# Altium PCB PCB1 2 layers.PcbDoc
Units mm, origin at the board's own origin, x right, y up, seen from the top; angles counter-clockwise.
Board outline 88 x 76.5 mm, 2 copper layers (Top Layer, Bottom Layer), stack 0.211 mm thick; 44 components, 65 nets, 251 pads, 118 vias.
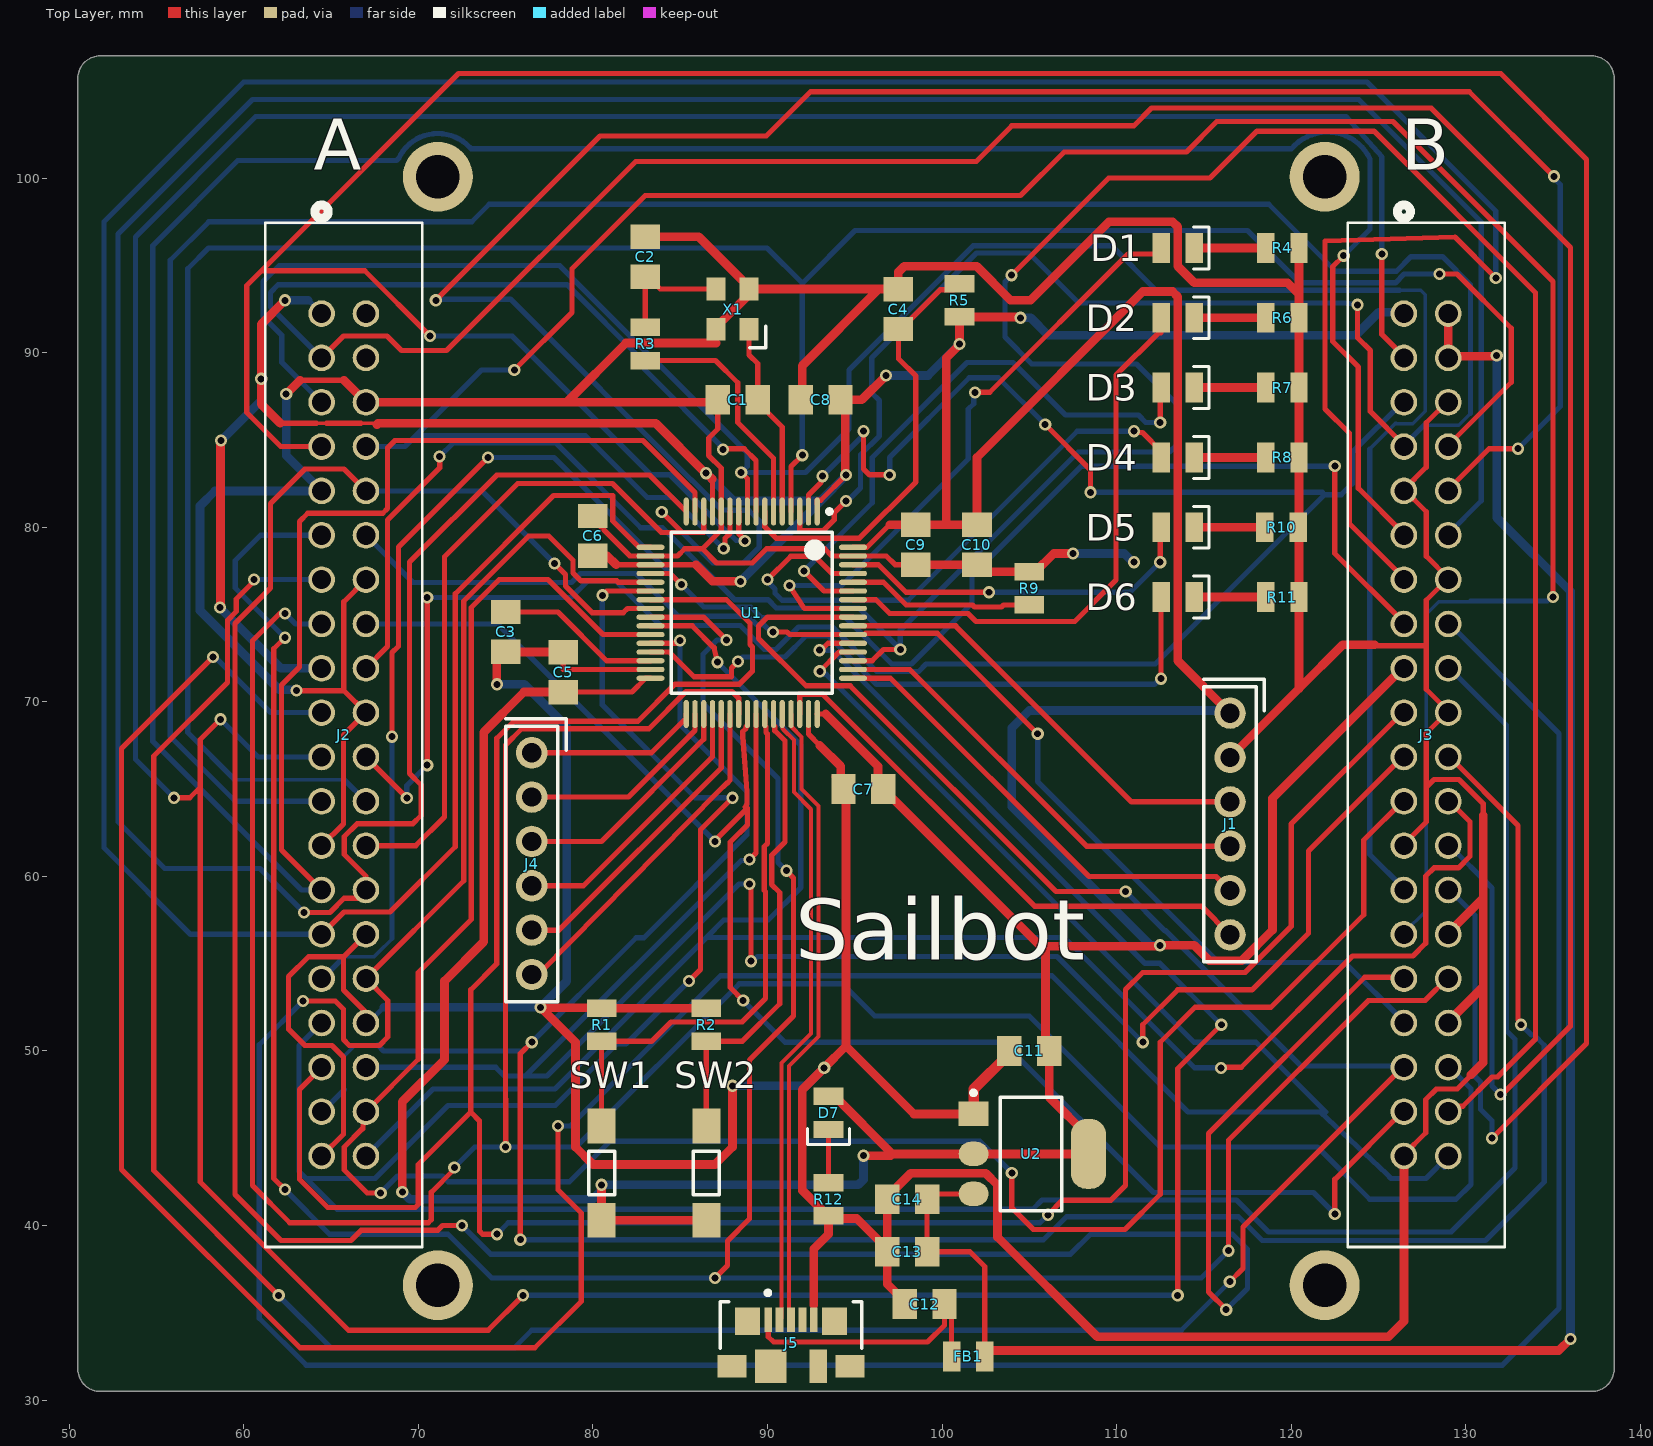
[diagram p0: Top Layer view]
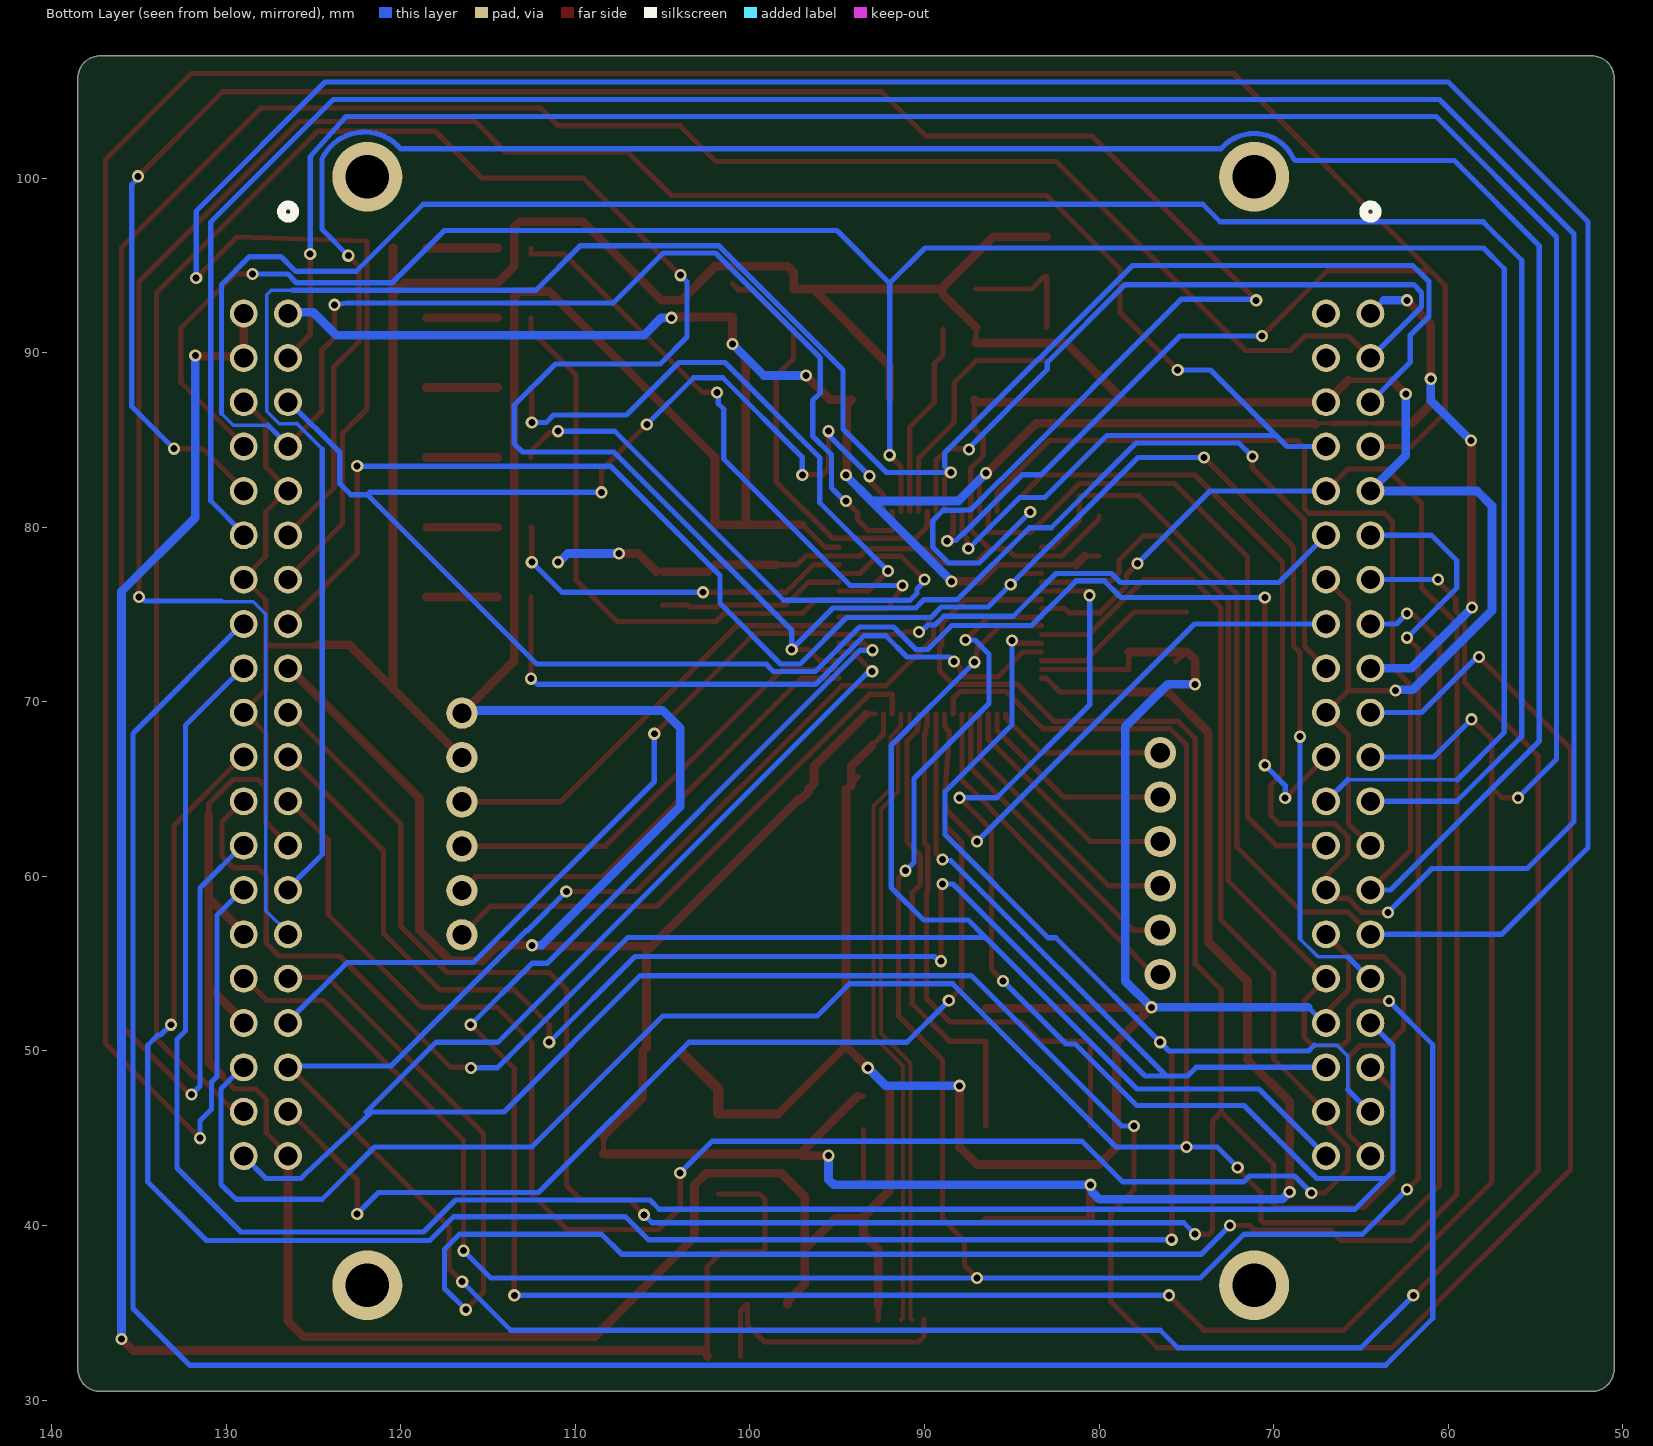
[diagram p1: Bottom Layer view, seen from below]
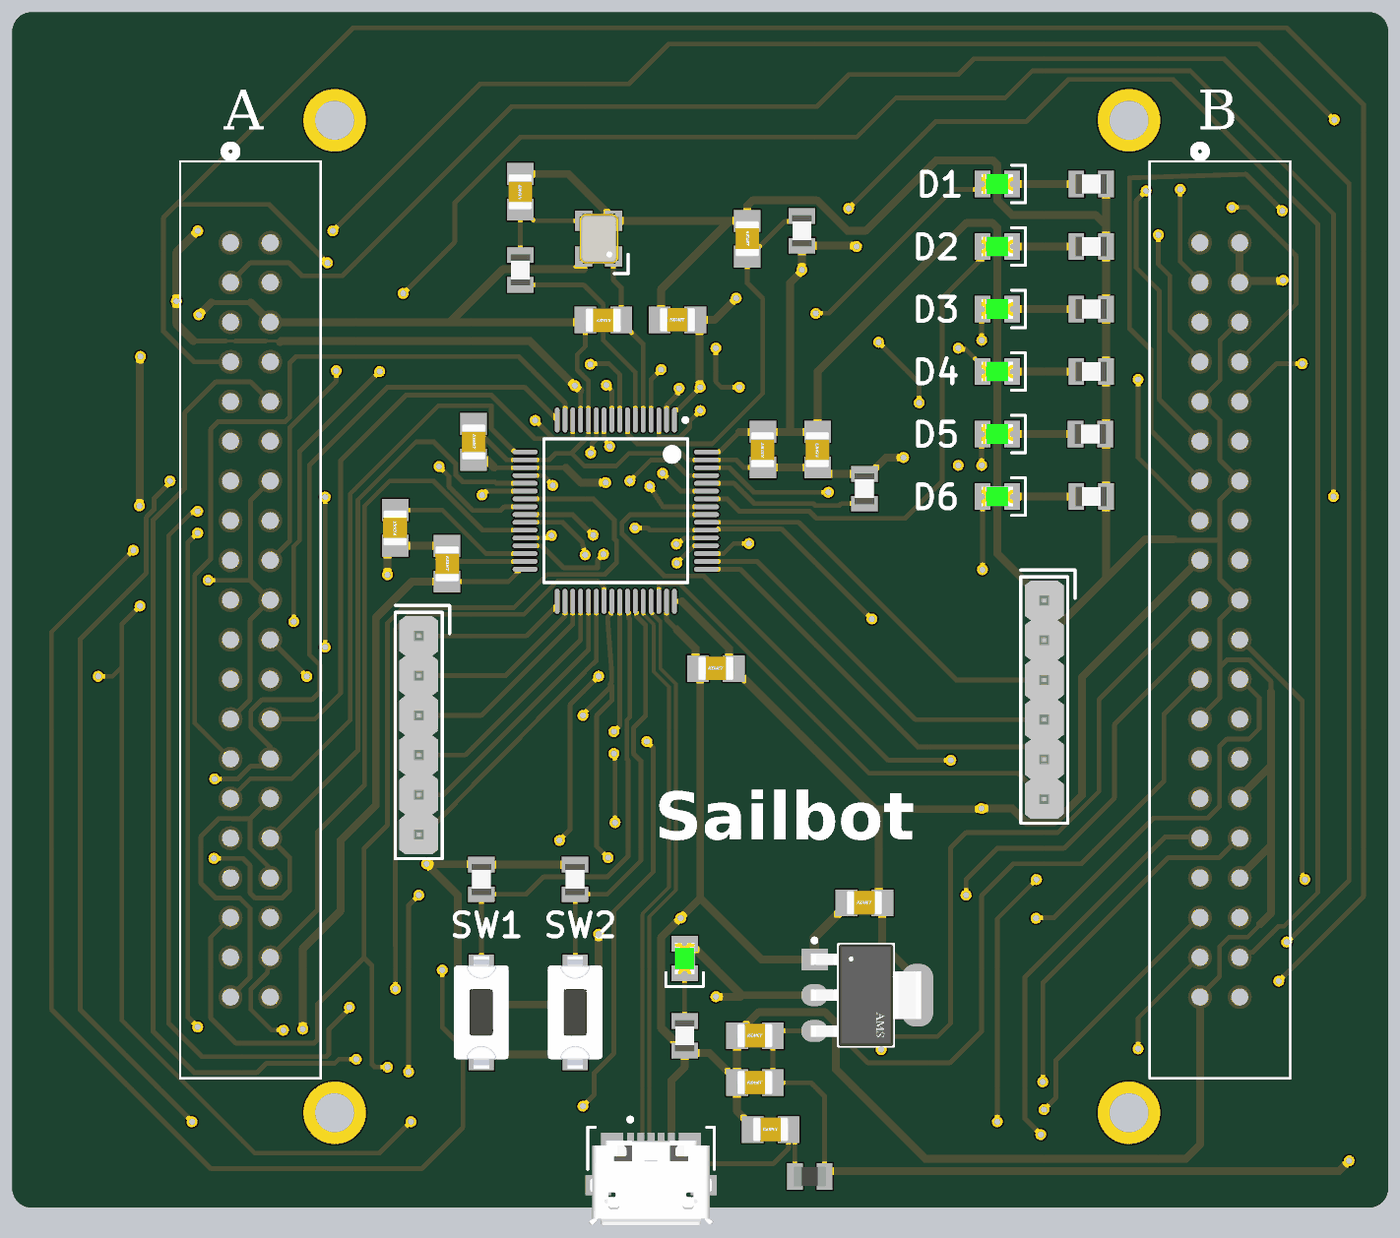
[diagram p2: 3D render of the assembled board from above, using the file's embedded part models]

## Layer stack, top to bottom
Top Solder: solder mask 0.0102, Solder Resist, Dk 3.5
Top Layer: signal copper 0.0356
Dielectric 1: core 0.1397, Core-017, Dk 4.1
Bottom Layer: signal copper 0.0356
Bottom Solder: solder mask 0.0102, Solder Resist, Dk 3.5

## Board outline
50.5,31.77 ccw(c51.77,31.77) 51.77,30.5 137.23,30.5 ccw(c137.23,31.77) 138.5,31.77 138.5,105.73 ccw(c137.23,105.73) 137.23,107 51.77,107 ccw(c51.77,105.73) 50.5,105.73

## Design rules (kind name [scope] priority, off if disabled: settings)
Clearance [All] p1: gap=0.254 ignorepadtopadclearanceinfootprint=FALSE except(0: Arc-Hole Track-Hole SMDPad-Hole THPad-Hole Via-Hole Fill-Hole Poly-Hole Region-Hole Text-Hole; 0.127: Arc-Arc Arc-Track Arc-SMDPad Track-Track Track-SMDPad SMDPad-SMDPad; 0.33: Arc-THPad Arc-Via Track-THPad Track-Via SMDPad-THPad SMDPad-Via THPad-Via Via-Via; 0.5: THPad-THPad)
DiffPairsRouting [All] p1: maxlimit=0.2 minlimit=0.2 mostfreqgap=0.2 toplayer_minwidth=0.235 toplayer_maxwidth=0.235 toplayer_prefwidth=0.235 bottomlayer_minwidth=0.235 bottomlayer_maxwidth=0.235 bottomlayer_prefwidth=0.235 impedanceprofiledriven=TRUE impedanceprofileid={3DAFF3E0-E45B-4C19-A753-60FD53768F31} impedanceprofilevalue=90.000000 maxuncoupledlength=12.7
HoleSize [IsVia] p1: absolutevalues=TRUE maxlimit=2.54 minlimit=0 maxpercent=80.000 minpercent=20.000
PolygonConnect [All] p1: connectstyle=Direct reliefconductorwidth=0.254 reliefentries=4 polygonreliefangle="90 Angle" airgapwidth=0.254
RoutingVias [All] p1: holewidth=0.4 width=0.7 viastyle="Through Hole" minholewidth=0.3 minwidth=0.55 maxholewidth=0.4 maxwidth=0.9
SolderMaskExpansion [All] p1: expansion=0.102 istentingtop=FALSE
UnRoutedNet [All] p1: checkbadconnections=TRUE
Width [All] p1: maxlimit=1 minlimit=0.13 preferedwidth=0.3 minimp=50.000000 maximp=50.000000 favimp=50.000000
27 further rules are at their usual default settings.

## Classes and differential pairs
differential pair USB_D: +USB_D_P -USB_D_N

## Components (designator, comment, footprint, x,y, rotation, side; value= is the part's Value field where it differs from the comment)
C1 "28pF" CAP_0805 88.3,87.3 r180 top
C2 "28pF" CAP_0805 83,95.5 r90 top
C3 "2.2uF" CAP_0805 75,74 r90 top
C4 "100nF" CAP_0805 97.5,92.5 r270 top
C5 "100nF" CAP_0805 78.3,71.7 r270 top
C6 "100nF" CAP_0805 80,79.5 r270 top
C7 "100nF" CAP_0805 95.5,65 r0 top
C8 "100nF" CAP_0805 93.043,87.3 r0 top
C9 "100nF" CAP_0805 98.5,79 r90 top
C10 "2.2uF" CAP_0805 102,79 r90 top
C11 "22uF" CAP_0805 105,50 r0 top
C12 "2.2uF" CAP_0805 99,35.5 r0 top
C13 "2.2uF" CAP_0805 98,38.5 r0 top
C14 "22uF" CAP_0805 98,41.5 r0 top
D1 "GREEN" LED_0805_GREEN 113.5,96 r180 top
D2 "GREEN" LED_0805_GREEN 113.5,92 r180 top
D3 "GREEN" LED_0805_GREEN 113.5,88 r180 top
D4 "GREEN" LED_0805_GREEN 113.5,84 r180 top
D5 "GREEN" LED_0805_GREEN 113.5,80 r180 top
D6 "GREEN" LED_0805_GREEN 113.5,76 r180 top
D7 "GREEN" LED_0805_GREEN 93.5,46.45 r90 top
FB1 "120R" FB_0805 101.5,32.5 r0 top
J1 "G800W302018EU" G800W302018EU 116.5,63 r0 top
J2 "BUFFER_LOW" CONN_3020-40-0100-00_CNC 64.46,92.24 r270 top
J3 "BUFFER_HIGH" CONN_3020-40-0100-00_CNC 126.46,92.24 r270 top
J4 "G800W302018EU" G800W302018EU 76.5,60.73 r0 top
J5 "473460001" FP-473460001-MFG 91.35,32.29 r0 top
R1 "10k" RES_0805 80.5,51.5 r270 top
R2 "10k" RES_0805 86.5,51.5 r270 top
R3 "0R" RES_0805 83,90.5 r90 top
R4 "1k" RES_0805 119.5,96 r180 top
R5 "10k" RES_0805 101,93 r270 top
R6 "1k" RES_0805 119.5,92 r180 top
R7 "1k" RES_0805 119.5,88 r180 top
R8 "1k" RES_0805 119.5,84 r180 top
R9 "10k" RES_0805 105,76.5 r270 top
R10 "1k" RES_0805 119.45,80 r180 top
R11 "1k" RES_0805 119.5,76 r180 top
R12 "1k" RES_0805 93.5,41.5 r90 top
SW1 "DTSM-3" DTSM-3 80.5,43 r270 top
SW2 "DTSM-3" DTSM-3 86.5,43 r270 top
U1 "STM32F401RBT6TR" STM-LQFP64_L 89.1,75.1 r270 top
U2 "AMS1117-3.3" FP-AMS1117-IPC_C 105.1,44.1 r0 top
X1 "24MHz" XTAL_3225 88,92.5 r90 top

## Footprints (in the part's own frame and the unit in brackets; to place one, negate y for a bottom-side part, rotate by r counter-clockwise, add the part's x,y. Pads: shape width x height; smd on the part's side, far side on the other; paste and mask are expansions set on the pad)
CAP_0805 [mm]
  rect 1.4x1.7 smd: 1(-1.143,0) 2(1.143,0)
  body extent -1.15,-0.76 1.15,0.79, height 1.01
CONN_3020-40-0100-00_CNC [mil]
  round 60 / inner round 60 / far side round 63 hole 43 paste-31.5 mask-31.5: 1(0,0) 2(0,100) 3(100,0) 4(100,100) 5(200,0) 6(200,100) 7(300,0) 8(300,100) 9(400,0) 10(400,100) 11(500,0) 12(500,100) 13(600,0) 14(600,100) 15(700,0) 16(700,100) 17(800,0) 18(800,100) 19(900,0) 20(900,100) 21(1000,0) 22(1000,100) 23(1100,0) 24(1100,100) 25(1200,0) 26(1200,100) 27(1300,0) 28(1300,100) 29(1400,0) 30(1400,100) 31(1500,0) 32(1500,100) 33(1600,0) 34(1600,100) 35(1700,0) 36(1700,100) 37(1800,0) 38(1800,100) 39(1900,0) 40(1900,100)
  silkscreen extent -245,-127 2105,227
DTSM-3 [mm]
  rect 2x1.6 smd: 1(-2.7,0) 2(2.7,0)
  silkscreen extent -1.25,-0.75 1.25,0.75, body extent -3.6,-1.75 3.6,1.75, height 4.96
FB_0805 [mm]
  rect 1x1.7 smd: 1(-0.95,0) 2(0.95,0)
  body extent -1,-0.63 1,0.63, height 0.86
FP-473460001-MFG [mm]
  rect 0.45x1.38 smd paste+0 mask+0: 1(-1.3,2.31) 2(-0.65,2.31) 3(0,2.31) 4(0.65,2.31) 5(1.3,2.31)
  rect 1.425x1.55 smd paste+0 mask+0: 6(-2.487,2.225) 7(2.488,2.225)
  rect 1.65x1.3 smd paste+0 mask+0: 8(-3.375,-0.35) 11(3.375,-0.35)
  rect 1.8x1.9 smd paste+0 mask+0: 9(-1.15,-0.35)
  rect 1x1.9 smd paste+0 mask+0: 10(1.55,-0.35)
  silkscreen extent -4.05,0.67 4.04,3.97, body extent -4.3,-2.48 4.3,3.45, height 0.25
FP-AMS1117-IPC_C [mm]
  rect 1.7x1.4 smd paste+0 mask+0: 1(-3.295,2.29)
  rrect100% 1.7x1.4 smd paste+0 mask+0: 2(-3.295,0) 3(-3.295,-2.29)
  rrect87% 2.004x4 smd paste+0 mask+0: 4(3.295,0)
  silkscreen extent -3.42,-3.25 1.75,3.62, body extent -3.9,-3.35 3.9,3.35, height 0.25
G800W302018EU [mm]
  round 1.8 hole 1.1 mask+0.07: 1(0,6.35) 2(0,3.81) 3(0,1.27) 4(0,-1.27) 5(0,-3.81) 6(0,-6.35)
  silkscreen extent -1.5,-7.9 1.97,8.3, body extent -1.25,-7.62 1.25,7.62, height 8.61
LED_0805_GREEN [mm]
  rect 1x1.7 smd: A(0.95,0) K(-0.95,0)
  silkscreen extent -1.8,-1.2 -0.9,1.2, body extent -1,-0.63 1,0.63, height 1.12
RES_0805 [mm]
  rect 1x1.7 smd: 1(-0.95,0) 2(0.95,0)
  body extent -1,-0.63 1,0.63, height 0.47
STM-LQFP64_L [mm] "QFP, 64-Leads, Body 10x10mm, Pitch 0.5mm, IPC High Density"
  oval 1.6x0.3 smd: 1(-5.8,3.75) 2(-5.8,3.25) 3(-5.8,2.75) 4(-5.8,2.25) 5(-5.8,1.75) 6(-5.8,1.25) 7(-5.8,0.75) 8(-5.8,0.25) 9(-5.8,-0.25) 10(-5.8,-0.75) 11(-5.8,-1.25) 12(-5.8,-1.75) 13(-5.8,-2.25) 14(-5.8,-2.75) 15(-5.8,-3.25) 16(-5.8,-3.75) 33(5.8,-3.75) 34(5.8,-3.25) 35(5.8,-2.75) 36(5.8,-2.25) 37(5.8,-1.75) 38(5.8,-1.25) 39(5.8,-0.75) 40(5.8,-0.25) 41(5.8,0.25) 42(5.8,0.75) 43(5.8,1.25) 44(5.8,1.75) 45(5.8,2.25) 46(5.8,2.75) 47(5.8,3.25) 48(5.8,3.75)
  oval 0.3x1.6 smd: 17(-3.75,-5.8) 18(-3.25,-5.8) 19(-2.75,-5.8) 20(-2.25,-5.8) 21(-1.75,-5.8) 22(-1.25,-5.8) 23(-0.75,-5.8) 24(-0.25,-5.8) 25(0.25,-5.8) 26(0.75,-5.8) 27(1.25,-5.8) 28(1.75,-5.8) 29(2.25,-5.8) 30(2.75,-5.8) 31(3.25,-5.8) 32(3.75,-5.8) 49(3.75,5.8) 50(3.25,5.8) 51(2.75,5.8) 52(2.25,5.8) 53(1.75,5.8) 54(1.25,5.8) 55(0.75,5.8) 56(0.25,5.8) 57(-0.25,5.8) 58(-0.75,5.8) 59(-1.25,5.8) 60(-1.75,5.8) 61(-2.25,5.8) 62(-2.75,5.8) 63(-3.25,5.8) 64(-3.75,5.8)
  silkscreen extent -5.92,-4.6 4.6,4.6, body extent -5,-5 5,5, height 1.6
XTAL_3225 [mm]
  rect 1.3x1.1 smd: 1(-1.15,-0.95) 2(1.15,-0.95) 3(1.15,0.95) 4(-1.15,0.95)
  silkscreen extent -2.23,-1.89 -1,-1, body extent -1.6,-1.28 1.6,1.22, height 0.61

## Part data
C1 C2 C3 C4 C5 C6 C7 C8 C9 C10 C11 C12 C13 C14: library part CAP_0805_16V, "Capacitor SMD 0805 16V"
D1 D2 D3 D4 D5 D6 D7: library part LED_0805_GREEN, "LED 0805 GREEN SMD"
FB1: library part FB_0805, "Ferrite Bead SMD 0805"
J1 J4: "Pin Header 6 Position 2.54mm Pitch", Manufacturer=Amphenol, Manufacturer Part Number=G800W302018EU
J2 J3: library part 3020-40-0100-00, "No Description Available", Mfr_Name="CNC Tech", RefDes=RefDes, Type=Type
J5: library part CMP-2000-05246-2, "CONN RCPT USB2.0 MICRO B SMD R/A", Current Rating=1.8A, Manufacturer=Molex, Package=0, Temperature="-30°C to +85°C", Temperature Range High=+85°C, Temperature Range Low=-30°C, Voltage Rating=30V, Automotive=No, Category=Conn, ComponentLink2Description=Datasheet, ComponentLink2URL=https://www.molex.com/webdocs/datasheets/pdf/en-us/0473460001_IO_CONNECTORS.pdf, Conn Orientation="Right Angle", Contact Material=Gold,Nickel, Device Class L1=Connectors, Device Class L2="USB Connectors", Device Class L3=unset, Digikey Description="CONN RCPT USB2.0 MICRO B SMD R/A", Footprint Url=https://www.molex.com/pdm_docs/sd/473460001_sd.pdf, Height=2.945mm, Is Female=yes, Lead Free=Yes, Manufacturer Part Number=473460001, Number Of Contacts=5, Octopart=https://octopart.com/47346-0001-molex-7164928, Pitch=0.65mm, RoHS=TRUE, Shielding=true, Usb Standard="USB 2.0"
R1 R2 R3 R4 R5 R6 R7 R8 R9 R10 R11 R12: library part RES_0805, "Resistor SMD 0805"
SW1 SW2: "Tactile Switch SMD SPST", Manufacturer=Diptronics, Manufacturer Part Number=DTSM-3
U1: library part CMP-0243-00143-1, "ARM Cortex-M4 32-bit MCU+FPU, 128 KB Flash, 64 KB Internal RAM, 50 I/Os, 64-Pin LQFP, -40 to 85 degC, Tape and Reel", I/Os (High Current)=50, Operating Frequency(F) (Processor speed) (MHz)=84, Package Description=LQFP64, Package Reference="64-Pin Low-profile Quad Flat Package, Body 10 x 10 mm, Pitch 0.5 mm", Supply Voltage(Vcc) min (V)=1.7, ComponentLink1Description="Manufacturer URL", ComponentLink1URL=http://www.st.com/, ComponentLink2Description=Datasheet, ComponentLink2URL=http://www.st.com/st-web-ui/static/active/en/resource/technical/document/datasheet/DM00086815.pdf, Core="ARM Cortex-M4", DatasheetVersion="Rev. 5", FLASH Size (Prog) (kB)=128, Internal RAM Size (kB)=64, Mounting Technology="Surface Mount", Packing="Tape and Reel"
U2: library part CMP-209535-000001-1, "LDO Voltage Regulators 1A, 3.3V", Dropout Voltage=1.1V, Manufacturer="Advanced Monolithic Systems", Max Junction Temp=+125°C, Max Power Dissipation=1.2W, Max Supply Voltage=15V, Nominal Supply Current=5mA, Output Current=1A, Output Voltage=3.3V, Package=AMS1117, Temperature="-40°C to +125°C", Temperature Range Low=-40°C, Automotive=No, Category=IC, ComponentLink2Description=Datasheet, ComponentLink2URL=http://www.advanced-monolithic.com/pdf/ds1117.pdf, Device Class L1="Integrated Circuits (ICs)", Device Class L2="Power Management ICs", Device Class L3="Voltage Regulators - Linear", Height=1.8mm, Ipc Land Pattern Name=SOT229P700X180-4, Lead Free=Yes, Manufacturer Part Number=AMS1117-3.3, Number Of Outputs=1, Octopart=https://octopart.com/ams1117-3.3-advanced+monolithic+systems-25899300, Output Type=Fixed, RoHS=TRUE, Standoff Height=0.64mm, Temperature Range High=+125°C
X1: library part TSX-3225_24.0000MF15X-AC, "Crystal SMD 24MHz 10PPM 7pF 3225", Manufacturer=Epson, Manufacturer Part Number="TSX-3225 24.0000MF15X-AC"

## Free pads (board coordinates)
  round 4 hole 2.5: 1(71.12,36.576) 1(71.12,100.076) 1(121.92,36.576) 1(121.92,100.076)

## Via types
v1: diameter 0.7, hole 0.4, Top Layer to Bottom Layer, 118 vias

## Nets (pads, with @x,y where several pads share a name; then routed paths per layer and width w, separated by ;. In a path a pad name is that pad's centre, name@x,y a point inside that pad or via, vN(x,y) a via of type N, cw(c..) or ccw(c..) an arc to the next point about the centre after c; other vN are vias at no path point)
3V3: C5.2 C6.2 C7.2 C8.2 C9.2 C10.2 C11.2 D7.A J1.1 J2.1 J2.17 J3.1 J3.17 R5.2 SW1.2 SW2.2 U1.1 U1.13 U1.19 U1.32 U1.48 U1.64 U2.2 U2.4 | length 378.1
  Top Layer w0.2: 64.159,85.955 64.761,85.955 ; 66.699,85.955 67.563,85.955 67.628,85.89
  Top Layer w0.3: v1(58.634,75.402) v1@58.667,75.435 ; v1@58.667,84.93 v1(58.699,84.963) ; 62.086,85.955 64.159,85.955 ; 64.761,85.955 66.699,85.955 ; C5.2 82.233,70.557 83.026,71.35 U1.32 ; C6.2 C6.2@80.825,78.357 ; 81.332,77.85 U1.19 85.903,77.85 ; U1.13 86.85,82.741 ; U1.48 93.343,69.3 ; U1.1@92.85,81.35 92.85,81.55 93.05,81.55 v1(94.5,83) ; D7.A D7.A@93.85,47.4 ; U1.64 95.707,78.85 97,80.143 ; v1@104.419,92.05 104.469,92 v1(104.5,92) ; U2.4 U2.4@108.395,45.098
  Top Layer w0.5: v1@58.667,75.435 v1@58.667,84.93 ; 62.086,85.955 61,87.042 v1(61,88.5) 61,91.635 v1(62.365,93) ; 67.628,85.89 67.693,85.955 83.594,85.955 v1@86.451,83.098 ; v1(69.085,41.927) 69.085,47.085 71.5,49.5 71.5,54 73.754,56.254 73.754,68.254 76.057,70.557 C5.2 ; v1(80.5,42.33) SW1.2 SW2.2 ; C6.2@80.825,78.357 81.332,77.85 ; 85.903,77.85 86.854,76.898 v1(88.456,76.898) ; v1@86.512,83.08 86.823,82.769 ; 93.343,69.3 96.338,66.305 96.338,65.305 C7.2 96.643,64.85 97.093,64.4 97.243,64.4 105.641,56.002 ; D7.A@93.85,47.4 97.15,44.1 ; v1(94.5,83) 94.462,83.038 94.462,87.024 C8.2 95.403,87.3 v1(96.799,88.697) ; v1(95.5,44) 97.05,44 97.15,44.1 ; 97,80.143 C9.2 100.25,80.143 ; v1@104.419,92.05 R5.2 101,90.446 100.25,89.696 100.25,80.143 ; U2.4 U2.2 97.15,44.1 ; U2.4@108.395,45.098 106.143,47.35 C11.2 105.923,50.22 105.923,55.72 105.641,56.002 ; J1.1 113.5,72.35 113.5,93.207 113.207,93.5 111.5,93.5 102,84 C10.2 100.25,80.143 ; J3.17@126.46,72 118.928,64.468 118.928,56.928 117.17,55.17 115.325,55.17 114.445,56.05 v1(112.491,56.05) 112.452,56.011 112.311,56.011 112.301,56.002 105.641,56.002
  Bottom Layer w0.3: 63.7,93 J2.1 ; 80.415,41.927 80.659,42.171 v1(80.5,42.33) ; J1.1@116.35,69.5 J1.1
  Bottom Layer w0.5: v1(58.634,75.402) 62.116,71.92 J2.17 ; v1(58.699,84.963) 61,87.264 v1(61,88.5) ; v1(62.365,93) 63.7,93 ; v1(69.085,41.927) 69.512,41.5 79.988,41.5 80.415,41.927 ; v1@80.529,42.301 80.558,42.33 95.207,42.33 95.5,42.623 v1(95.5,44) ; v1(86.476,83.098) 88.075,81.5 93.057,81.5 ; v1(88.456,76.898) 93.057,81.5 ; v1(94.5,83) 94.5,82.963 93.057,81.52 93.057,81.5 ; v1(96.799,88.697) 99.197,88.697 v1(101,90.5) ; v1(104.5,92) 105.076,92 106.076,91 123.699,91 125.019,92.32 J3.1@126.46,92.32 ; v1(112.491,56.05) 112.483,56.057 111.943,56.057 104,64 104,68.5 105,69.5 J1.1@116.35,69.5
5V: C13.2 C14.2 FB1.2 J3.2 J3.4 U2.3 | length 112.1
  Top Layer w0.3: U2.3 99.453,41.81 C14.2 C13.2 101.6,38.5 102.45,37.65 FB1.2
  Top Layer w0.5: FB1.2 102.45,32.585 102.7,32.835 135.335,32.835 v1(136,33.5) ; J3.2 J3.4 129.102,89.802 131.738,89.802 v1(131.777,89.84)
  Bottom Layer w0.5: v1(131.777,89.84) 131.777,80.538 136,76.315 v1(136,33.5)
GND: C1.2 C2.2 C3.1 C4.1 C5.1 C6.1 C7.1 C8.1 C9.1 C10.1 C11.1 C12.1 C13.1 C14.1 J1.2 J2.6 J2.9 J2.14 J2.20 J2.25 J2.30 J2.34 J2.39 J3.6 J3.9 J3.14 J3.20 J3.25 J3.30 J3.34 J3.39 J5.5 R1.1 R2.1 R4.1 R6.1 R7.1 R8.1 R9.1 R10.1 R11.1 R12.1 U1.12 U1.18 U1.31 U1.47 U1.63 U2.1 X1.2 X1.4 | length 497.3
  Top Layer w0.3: v1(63.027,70.653) 63.043,70.637 65.743,70.637 ; 63.221,88.417 65.743,88.417 ; J2.39 65.71,45.23 65.71,49.657 65.049,50.317 63.5,50.317 62.568,51.249 62.568,54.263 63.703,55.397 65.71,55.39 ; J2.25 65.71,63.01 65.71,68.09 J2.20 65.743,70.637 ; J2.34 67,52.202 65.71,53.492 65.71,55.39 ; J2.30 65.71,55.39 ; J2.14 65.735,75.735 65.735,70.645 65.743,70.637 ; C3.1 75.056,72.857 C3.1@75.606,72.307 ; C5.1 78.3,71.85 U1.31 ; C6.1 80,80.467 82.117,78.35 U1.18@83.95,78.35 ; U1.18@83.952,78.352 84.852,78.352 85.267,78.767 86.273,78.767 ; 87.05,90.551 X1.4 X1.4@87.05,91.45 ; C1.2 87.157,85.622 86.631,85.096 86.631,84.117 87.35,83.398 U1.12 87.35,79.844 86.273,78.767 ; X1.2@88.95,93.35 88.95,93.643 X1.2 X1.2@88.95,93.75 ; C8.1 C8.1@91.991,87.391 ; U1.47 92.35,68.15 93,67.5 ; J5.5 92.65,35.449 ; C7.1@93.807,65.7 94.5,65.007 C7.1@94.5,65 ; C14.1 C14.1@96.857,41.65 ; C9.1 97.3,77.857 96.807,78.35 U1.63 93.701,78.35 93.285,78.765 89.939,78.765 89.126,77.953 87.088,77.953 86.273,78.767 ; C11.1@103.857,49.85 C11.1 ; R9.1 R9.1@105.35,77.45 ; 124.77,73.27 124.832,73.208 127.737,73.208 ; J3.39@126.46,44.06 127.711,45.311 127.711,47.211 128.318,47.818 129.514,47.818 130.302,48.606 130.302,48.641 ; J3.25@126.46,61.84 127.737,63.117 127.737,65.1 ; J3.6@129,87.24 127.743,85.983 127.743,83.443 126.46,82.16 127.737,80.883 127.737,78.343 129,77.08 127.737,75.817 127.737,73.208 ; 131,63.5 131,64.174 129.622,65.551 128.188,65.551 127.737,65.1 ; 127.737,65.1 127.737,68.197 129,69.46 127.737,70.723 127.737,73.208
  Top Layer w0.5: v1(62.433,87.63) 63.221,88.417 ; 65.743,88.417 J2.6 78.506,87.16 ; v1(74.5,71) 74.5,72.407 74.95,72.857 C3.1 C5.1@78.286,72.857 ; v1(77,52.5) 79,50.5 79,44.5 80,43.5 87,43.5 88,44.5 v1(88,48) ; v1@77.025,52.475 80.475,52.475 R1.1 R2.1 ; C2.2 86.057,96.643 X1.2@88.95,93.75 ; 87.05,90.551 81.897,90.551 78.506,87.16 ; X1.4@87.05,91.45 X1.2@88.95,93.35 ; C1.2 87.017,87.16 78.506,87.16 ; X1.2@88.95,93.643 96.38,93.643 ; C8.1@91.991,87.391 91.991,89.254 96.38,93.643 ; 92.65,35.449 92.65,38.65 93.5,39.5 R12.1@93.5,40.51 ; 93,67.5 94.193,66.307 C7.1@94.193,65.164 ; R12.1@93.46,40.55 92,42.01 92,47.783 v1(93.25,49.033) 94.5,50.283 ; R12.1@93.643,40.407 95.1,40.407 C13.1@96.857,38.65 ; C7.1@94.5,65 94.5,50.283 ; C14.1 C13.1@96.857,38.65 ; C14.1@96.857,41.65 98.207,43 102.5,43 103.175,42.325 103.175,39.344 108.892,33.627 125.575,33.627 126.46,34.512 J3.39@126.46,44.06 ; C12.1 97.857,35.65 96.857,36.65 C13.1 C13.1@96.857,38.65 ; C9.1 C10.1 102.407,77.45 R9.1 ; U2.1 98.393,46.39 94.5,50.283 ; R9.1@105.35,77.45 106.4,78.5 v1(107.5,78.5) ; J1.2 120.45,70.76 ; R4.1 120.45,93.345 ; 124.77,73.27 122.96,73.27 120.45,70.76 ; J3.34@129,51.68 131,53.68 ; J3.30@129,56.76 131,58.76 ; 130.302,48.641 131,49.339 131,53.68 ; 131,63.5 131,58.76 ; 96.38,93.643 C4.1 97.5,94.615 97.83,94.945 101.981,94.945 103.926,93 105.065,93 109.565,97.5 113.207,97.5 113.5,97.207 113.5,94.958 114.452,94.005 119.79,94.005 120.45,93.345 ; 120.45,70.76 R11.1 R8.1 R7.1 R6.1 120.45,93.345 ; 131,53.68 131,58.76
  Top Layer w0.6: U2.1 101.805,47.798 C11.1@103.857,49.85
  Bottom Layer w0.3: J2.34 67.121,51.6 68.021,52.5
  Bottom Layer w0.5: v1(62.433,87.63) 62.433,84.107 J2.9 58.356,82.08 57.5,81.224 57.5,75.22 62.028,70.691 62.989,70.691 v1(63.027,70.653) ; 68.021,52.5 v1(77,52.5) 78.5,54 78.5,68.573 76.073,71 v1(74.5,71) ; v1(88,48) 92.217,48 v1(93.25,49.033) ; v1(107.5,78.5) 110.446,78.5 110.946,78 v1(111,78)
GPIO_3: J2.3 J3.26 U1.8 | length 187.7
  Top Layer w0.3: J2.3 65.717,90.957 68.199,90.957 69.037,90.119 71.619,90.119 82.457,100.957 101.957,100.957 104,103 111,103 112.009,104.009 128.02,104.009 136,96.029 136,51.421 132.079,47.5 v1(132,47.5) ; v1(87.461,84.461) 87.5,84.5 88.67,84.5 89.35,83.82 U1.8
  Bottom Layer w0.3: J2.3 61.535,92.625 61.535,93.453 61.978,93.896 78.52,93.896 82.971,89.444 82.971,89.029 87.461,84.539 v1(87.461,84.461) ; J3.26@129,61.84 131.5,59.34 131.5,48 v1(132,47.5)
GPIO_5: J2.5 J3.27 U1.9 | length 129.1
  Top Layer w0.3: v1(88.494,83.134) 88.85,82.778 U1.9
  Bottom Layer w0.2: 119.338,93.573 119.388,93.623 ; 124.5,84.48 125.99,85.97 126.03,85.93 126.97,85.93 127.69,86.65 127.69,93.31 127.427,93.573 126.198,93.573
  Bottom Layer w0.3: J2.5 62.183,89.438 62.183,90.992 61.108,92.067 61.108,94.077 62.031,95 78.096,95 88.849,84.247 88.849,83.49 v1(88.494,83.134) 92.182,83.134 94.67,85.622 94.67,89.005 101.795,96.13 109.711,96.13 112.267,93.573 119.338,93.573 126.198,93.573 ; 124.5,84.48 124.5,61.26 J3.27@126.46,59.3
GPIO_7: J2.7 J3.28 U1.10 | length 205.8
  Top Layer w0.3: J2.7 62.116,84.62 60.17,86.566 60.17,93.85 61.011,94.691 ; v1(70.663,90.957) 66.929,94.691 61.011,94.691 ; U1.10 88.35,79.65 88.705,79.295 v1(88.705,79.205) ; v1(131.5,45) 136.927,50.427 136.927,101.071 132.012,105.986 72.306,105.986 61.011,94.691
  Bottom Layer w0.3: v1(70.663,90.957) 75.376,90.957 83.334,83 84.417,83 87.804,79.613 87.837,79.613 88.209,79.24 88.67,79.24 v1(88.705,79.205) ; J3.28@129,59.3 130.531,57.769 130.531,48.539 130.84,48.23 130.84,46.66 131.5,46 v1(131.5,45)
GPIO_8: J2.8 J3.29 U1.11 | length 148
  Top Layer w0.3: v1(75.5,89) 78.806,92.306 78.806,94.806 83,99 104.5,99 107,101.5 114,101.5 115.74,103.24 125.839,103.24 135,94.079 v1(135,76) ; v1(87.493,78.783) 87.57,78.859 87.57,79.37 87.85,79.65 U1.11
  Bottom Layer w0.2: J3.29@126.46,56.76 127.73,58.03 127.73,75.01 128.447,75.727 130.227,75.727 130.279,75.779
  Bottom Layer w0.3: J2.8 69.236,84.62 69.873,85.257 ; v1(75.5,89) 73.616,89 69.873,85.257 ; v1@87.469,78.783 84.546,81.705 83.118,81.705 79.567,85.257 69.873,85.257 ; 130.279,75.779 134.671,75.779 134.892,76 v1(135,76)
GPIO_10: J2.10 J3.31 U1.24 | length 157.3
  Top Layer w0.3: J2.10 65.743,83.337 63.5,83.337 61.527,81.364 61.527,76.517 59.5,74.491 59.5,41.77 62.129,39.141 66.146,39.141 66.737,39.733 71.124,39.733 71.391,40 v1(72.5,40) ; v1(77.8,77.927) 78.435,77.292 78.435,76.632 79.959,75.108 81.737,75.108 81.979,75.35 U1.24 ; v1(116.281,35.179) 115.265,36.195 115.265,45.265 124.22,54.22 J3.31@126.46,54.22
  Bottom Layer w0.3: J2.10 73.647,82.08 v1(77.8,77.927) ; v1(72.5,40) 74.142,38.358 75.501,38.358 85.607,38.358 107.358,38.358 108.5,39.5 116.639,39.5 117.5,38.639 117.5,36.398 v1(116.281,35.179)
GPIO_11: J2.11 J3.32 U1.25 | length 169.2
  Top Layer w0.3: v1(62.357,42.062) 61.723,42.697 61.723,73.039 v1(62.357,73.673) ; U1.25 86.338,74.85 v1(87.655,73.533) ; v1(87,37) 87.708,37.708 87.708,39.117 88.976,40.386 88.976,49.476 91.5,52 91.5,59.909 v1(91.084,60.325) ; v1(116.408,38.557) 116.408,44.882 124.423,52.896 127.676,52.896 J3.32@129,54.22
  Bottom Layer w0.3: v1(62.357,42.062) 64.919,39.5 71.708,39.5 74.208,37 v1(87,37) 114.851,37 v1(116.408,38.557) ; v1(62.357,73.673) 59.512,76.517 59.512,78.092 60.96,79.54 J2.11 ; v1(87.655,73.533) 87.112,73.533 86.305,72.726 86.305,69.905 90.606,65.604 90.606,60.804 v1(91.084,60.325)
GPIO_12: J2.12 J3.33 U1.54 | length 73.1
  Top Layer w0.3: v1(90.324,73.997) 91.126,73.997 91.274,73.85 95.55,73.85 95.623,73.923 99.726,73.923 v1(105.479,68.17)
  Bottom Layer w0.3: J2.12 69.705,76.835 78.766,76.835 79.286,77.355 82.463,77.355 84.918,74.9 88.9,74.9 89.4,74.4 89.812,74.4 90.215,73.997 v1(90.324,73.997) ; v1(105.479,68.17) 105.479,65.437 115.849,55.067 123.073,55.067 J3.33@126.46,51.68
GPIO_13: J2.13 J3.35 U1.56 | length 177.4
  Top Layer w0.3: v1(60.591,77) 60.591,76.906 59.573,75.887 59.573,75.167 59.073,74.667 59.073,71.113 54.847,66.886 54.847,43.153 v1(62,36) ; U1.56 90.002,74.85 89.494,74.341 89.494,73.625 92.201,70.917 94.737,70.917 106.522,59.131 v1(110.524,59.131) ; v1(116.484,36.779) 117.238,37.533 117.238,39.918 J3.35@126.46,49.14
  Bottom Layer w0.3: v1(60.591,77) J2.13 ; v1(62,36) 65,33 75.5,33 76.5,34 113.705,34 v1(116.484,36.779) ; v1(110.524,59.131) 112.775,56.88 112.834,56.88 120.574,49.14 J3.35@126.46,49.14
GPIO_15: J2.15 J3.36 U1.39 | length 164.9
  Top Layer w0.3: v1(62.357,75.063) 62.063,75.063 60.5,73.499 60.5,42.294 62.634,40.16 70.57,40.16 70.746,40.336 70.746,41.908 72.06,43.222 v1(72.06,43.33) ; v1(75,44.5) 75.006,44.506 75.006,47.246 75,47.252 75,67.532 75.928,68.46 83.215,68.46 85.34,70.584 87.975,70.584 88.35,70.21 U1.39
  Bottom Layer w0.3: v1(62.357,75.063) 62.96,74.46 J2.15 ; v1(72.06,43.33) 73.23,44.5 79.041,44.5 88.389,53.848 94.295,53.848 96.143,52 105,52 112.5,44.5 121.5,44.5 124.5,41.5 129.449,41.5 130.302,42.353 130.302,47.838 J3.36@129,49.14
GPIO_16: J2.16 J3.37 U1.40 | length 91.6
  Top Layer w0.3: v1(87,62) 87,62.061 88.85,63.911 88.85,62.951 87.867,61.968 87.867,53.637 v1(88.609,52.894) ; 88.731,63.977 88.83,64.156 88.83,64.844 88.588,68.035 88.588,68.284 88.777,68.473 88.777,68.577 88.85,68.65 U1.40 ; v1(122.504,40.665) 122.504,42.644 J3.37@126.46,46.6
  Bottom Layer w0.3: J2.16 74.54,74.46 v1(87,62) ; v1(88.609,52.894) 91.003,50.5 103.5,50.5 112.109,41.891 121.278,41.891 v1(122.504,40.665)
GPIO_18: J2.18 J3.38 U1.51 | length 174
  Top Layer w0.3: J2.18 68.242,73.162 68.242,80.411 71.222,83.391 v1(71.222,84.049) ; U1.51 95.997,72.35 96.647,73 v1(97.612,73) ; v1(103.988,94.437) 109.55,100 115.352,100 118.042,102.691 124.741,102.691 134,93.432 134,50.674 131.83,48.504 131.504,48.504 129.834,46.834 129.234,46.834 J3.38@129,46.6
  Bottom Layer w0.3: v1(71.222,84.049) 72.003,84.83 77.883,84.83 82.745,79.969 83.99,79.969 88.106,75.852 90.026,75.852 90.508,75.37 95.242,75.37 v1(97.612,73) 97.612,74.112 107.803,84.303 113.03,84.303 113.5,84.773 113.5,87 111.143,89.357 105.143,89.357 103.607,90.893 103.607,94.056 v1(103.988,94.437)
GPIO_19: J2.19 J3.40 U1.52 | length 184
  Top Layer w0.3: v1(58.243,72.568) 53,67.325 53,43.215 63.215,33 76.674,33 79.33,35.656 79.33,40.72 78,42.05 v1(78,45.706) ; v1(93,71.747) 94.103,72.85 U1.52
  Bottom Layer w0.3: v1(58.243,72.568) 58.351,72.568 61.539,69.38 J2.19 ; v1(78,45.706) 78.706,45.706 87.306,54.306 106.291,54.306 114.098,46.5 121.673,46.5 ; v1(93,71.747) 93.108,71.747 93.277,71.578 93.363,71.578 114.441,50.5 117.978,50.5 121.978,46.5 121.673,46.5 ; J3.40@128.764,43.321 128.849,43.406 128.87,43.484 J3.40 127.72,42.7 125.73,42.7 125.466,42.964 121.673,46.5
GPIO_21: J2.21 J3.3 U1.53 | length 266.6
  Top Layer w0.3: v1(56,64.5) 56.905,64.5 57.506,65.1 ; v1(58.67,69) 57.506,67.836 57.506,65.1 ; v1(76,36) 74,34 66,34 57.506,42.494 57.506,65.1 ; v1(92.976,72.957) 93.084,72.957 93.477,73.35 U1.53 ; v1(113.5,36) 113.5,49 v1(116,51.5) ; v1(125.197,95.656) 125.197,91.043 J3.3@126.46,89.78
  Bottom Layer w0.3: v1(56,64.5) 53.794,66.706 53.794,96.632 60.691,103.53 123.133,103.53 123.227,103.436 125.197,101.214 v1(125.197,95.656) ; v1(58.67,69) 60.83,66.84 J2.21 ; v1(76,36) v1(113.5,36) ; v1(92.976,72.957) 93.692,72.957 111.631,55.018 112.482,55.018 v1(116,51.5)
GPIO_22: J2.22 J3.5 U1.2 | length 123.3
  Top Layer w0.3: J2.22 68.174,65.666 68.174,65.659 v1(69.342,64.491) ; v1(70.51,66.37) v1(70.51,75.971) ; U1.2 92.35,81.85 93.071,82.571 93.071,82.849 v1(93.147,82.926) ; v1(95.5,85.5) 95.5,83.341 95.841,83 v1(97,83) ; v1(105.91,85.877) 108.5,83.287 v1(108.5,82)
  Bottom Layer w0.3: v1(69.342,64.491) 69.342,65.202 v1(70.51,66.37) ; v1(70.51,75.971) 78.748,75.971 79.705,76.928 81.314,76.928 83.871,74.371 88.443,74.371 89.814,73 90.5,73 91.78,74.28 93.72,74.28 96.257,71.743 98.667,71.743 99.085,72.161 112.217,72.161 121.92,81.864 ; v1(93.147,82.926) 95.423,85.202 95.423,85.423 v1(95.5,85.5) ; v1(97,83) 97,84 101.562,88.562 103.226,88.562 v1(105.91,85.877) ; v1(108.5,82) 121.784,82 121.92,81.864 ; J3.5@126.46,87.24 123.495,84.275 123.495,82.495 122.864,81.864 121.92,81.864
GPIO_23: J2.23 J3.7 U1.3 | length 182.4
  Top Layer w0.3: U1.3 91.85,79.807 93.218,79.807 93.821,80.41 93.821,80.821 v1(94.5,81.5) ; v1(123.8,92.743) 123.8,90.856 124.536,90.119 124.536,86.624 J3.7@126.46,84.7
  Bottom Layer w0.2: 127.604,85.844 128.88,85.844 cw(c129,84.62) 129.111,85.845 cw(c129,84.62) 129.12,85.844 129.602,85.844 130.28,86.522
  Bottom Layer w0.3: J2.23 59.512,64.3 55.794,68.018 55.794,95.294 58,97.5 73.062,97.5 74.062,98.5 118.721,98.5 122.555,94.666 126.035,94.666 126.869,95.5 128.674,95.5 130.28,93.894 130.28,86.522 ; v1(94.5,81.5) 94.589,81.5 95.33,82.241 95.33,84.156 96.41,85.236 96.41,87.261 95.969,87.702 95.969,89.701 101.972,95.703 104.97,95.703 107.829,92.843 123.098,92.843 v1(123.8,92.743) ; J3.7@126.46,84.7 127.604,85.844
GPIO_24: J2.24 J3.8 U1.4 | length 141.1
  Top Layer w0.3: U1.4 91.35,83.476 v1(91.999,84.125) ; v1(128.5,94.5) 129.503,94.5 132.607,91.396 132.607,88.307 J3.8@129,84.7
  Bottom Layer w0.2: 59.5,65.53 65.77,65.53
  Bottom Layer w0.3: 59.5,65.53 56.794,68.237 56.794,94.808 57.985,96 89.979,96 91.999,93.98 ; 65.77,65.53 J2.24 ; v1(91.999,84.125) 91.999,93.98 ; v1(128.5,94.5) 126.473,94.5 125.973,94 120.5,94 117.5,97 95.019,97 91.999,93.98
GPIO_26: J2.26 J3.10 U1.14 | length 165.6
  Top Layer w0.3: J2.26 69.85,61.76 71.501,63.411 71.501,78.308 75.692,82.499 81.128,82.499 83.922,79.705 85.115,79.705 ; v1@71.209,93.209 80.407,102.407 89.929,102.407 92.471,104.949 130.204,104.949 v1(135.052,100.101) ; v1(83.945,80.875) 85.115,79.705 ; U1.14 86.35,79.705 85.115,79.705 ; J3.10@129,82.16 131.34,84.5 v1(133,84.5)
  Bottom Layer w0.3: v1(71,93) 71.066,93.066 75.283,93.066 85.658,82.69 85.674,82.69 87.376,80.987 87.914,80.987 87.928,80.973 88.928,80.973 89.535,80.366 89.535,78.861 88.626,77.953 86.868,77.953 v1(83.945,80.875) ; v1(133,84.5) 135.416,86.916 135.416,99.629 135.052,99.993 v1(135.052,100.101)
GPIO_27: J2.27 J3.11 U1.15 | length 190.6
  Top Layer w0.3: J2.27 62.17,61.51 62.17,70.97 63.195,71.995 63.195,80.328 63.665,80.797 67.963,80.797 68.242,81.077 68.242,84.549 68.656,84.963 82.878,84.963 85.85,81.991 U1.15 ; v1(123.012,95.555) 122.377,94.92 122.377,90.653 123.85,89.179 123.85,82.23 J3.11@126.46,79.62
  Bottom Layer w0.3: J2.27 63.302,59.22 54.794,67.729 54.794,96.139 59.658,101.003 68.75,101.003 68.838,101.091 68.874,101.127 cw(c71.12,100.076) 71.12,102.556 cw(c71.12,100.076) 72.924,101.778 72.927,101.775 ; 72.927,101.775 73.015,101.687 120.025,101.687 cw(c122.08,99.94) 124.524,101.083 124.524,97.066 v1(123.012,95.555)
GPIO_28: J2.28 J3.12 U1.16 | length 195.7
  Top Layer w0.3: v1(63.449,57.937) 64.934,57.937 65.747,58.75 67,58.75 J2.28 67,60.004 65.758,61.246 65.758,62.274 66.491,63.008 69.675,63.008 70.172,63.504 70.172,65.219 69.5,65.891 69.5,78 74.5,83 83.25,83 U1.16
  Bottom Layer w0.3: v1(63.449,57.937) 60.935,60.452 55.474,60.452 52.794,63.132 52.794,96.794 60.5,104.5 123.871,104.5 130.894,97.477 130.894,81.514 J3.12@129,79.62
GPIO_29: J2.29 J3.13 U1.17 | length 212.1
  Top Layer w0.3: J2.29 65.738,57.958 68.377,57.958 72.115,61.696 72.115,76.184 77.752,81.822 81.135,81.822 81.135,80.365 82.65,78.85 U1.17 ; J3.13@126.46,77.08 123.342,80.198 123.342,85.384 121.945,86.781 121.945,96.393 129.388,96.622 v1(131.724,94.285)
  Bottom Layer w0.3: J2.29 56.96,56.68 52,61.64 52,97.5 60,105.5 124.345,105.5 131.724,98.12 v1(131.724,94.285)
GPIO_31: J2.31 J3.15 U1.20 | length 106.5
  Top Layer w0.3: v1(68.5,68) 68.5,72.816 68.87,73.186 68.87,78.87 v1(74,84) ; U1.20 84.43,77.35 v1(85.065,76.715) ; v1(122.5,83.5) 122.5,78.5 J3.15@126.46,74.54
  Bottom Layer w0.2: 65.743,55.383 67.445,55.383 67.674,55.611 68.5,56.437
  Bottom Layer w0.3: J2.31 64.46,54.1 65.743,55.383 ; 68.5,56.437 v1(68.5,68) ; v1(74,84) 77.78,84 v1(85.065,76.715) 86.355,75.425 89.04,75.425 89.638,74.827 94.464,74.827 97.121,72.17 98.243,72.17 101.723,75.65 101.723,77.229 107.994,83.5 v1(122.5,83.5)
GPIO_32: J2.32 J3.16 U1.21 | length 186.7
  Top Layer w0.3: v1(63.398,52.857) 65.24,52.857 65.71,52.387 65.71,50.648 66.04,50.317 67.767,50.317 68.25,50.8 68.25,52.89 J2.32 72.606,59.746 72.606,75.781 76.327,79.502 77.47,79.502 78.867,78.105 78.867,77.38 79.319,76.928 81.373,76.928 81.452,76.85 U1.21
  Bottom Layer w0.3: v1(63.398,52.857) 60.892,50.351 60.892,34.688 63.58,32 132.101,32 135.348,35.247 135.348,68.192 J3.16@129,74.54
GPIO_33: J2.33 J3.18 U1.22 | length 169.3
  Top Layer w0.3: v1(80.543,76.098) 80.795,76.35 U1.22 ; v1(85.5,54) 86.17,54.67 86.17,62.67 v1(88,64.5)
  Bottom Layer w0.3: J2.33 63.17,50.31 63.17,43.104 63.576,42.697 ; v1(80.543,76.098) 80.543,69.825 85.868,64.5 v1(88,64.5) ; v1(85.5,54) 81.896,50.396 81.368,50.396 77.84,46.869 71.699,46.869 67.528,42.697 63.576,42.697 ; J3.18@129,72 132.34,68.66 132.34,51.156 132.83,50.666 132.83,43.295 129.166,39.631 118.702,39.631 116.869,41.464 105.727,41.464 105.198,40.934 65.339,40.934 63.576,42.697
GPIO_35: J2.35 J3.19 U1.23 | length 150.9
  Top Layer w0.3: J2.35 63.195,47.795 63.195,42.647 64.813,41.029 69.824,41.029 70,41.205 70,43.5 73,46.5 ; v1(74.5,39.5) 73.681,39.5 73.506,39.676 73.506,45.994 73,46.5 ; U1.23 87.654,75.85 89.006,74.498 89.006,73.284 89.146,73.144 89.146,71.755 88.402,71.011 84.705,71.011 82.58,68.887 75.472,68.887 74.5,67.915 74.5,55 73,53.5 73,46.5 ; v1(106.07,40.615) 106.909,41.453 109.677,41.453 110.513,42.289 110.513,53.513 111.5,54.5 117.365,54.5 120,57.135 120,63 J3.19@126.46,69.46
  Bottom Layer w0.3: v1(74.5,39.5) 75.154,40.154 105.61,40.154 106.05,40.594 v1@106.05,40.635
GPIO_36: J2.36 J3.21 U1.41 | length 107.4
  Top Layer w0.3: v1(88.976,59.563) 89.052,59.487 v1(89.052,55.143) ; v1(88.976,60.96) 89.35,61.334 U1.41 ; v1(111.5,50.5) 111.5,51.5 113.5,53.5 117.762,53.5 121,56.738 121,61.46 J3.21@126.46,66.92
  Bottom Layer w0.3: J2.36 74.435,49.06 74.932,48.563 76.149,48.563 ; v1(88.976,59.563) 88.364,59.563 77.364,48.563 76.149,48.563 ; v1(88.976,60.96) 88.926,60.909 88.496,60.909 76.149,48.563 ; v1(89.052,55.143) 89.155,55.143 89.428,55.417 106.583,55.417 v1(111.5,50.5)
GPIO_37: J2.37 J3.22 U1.28 | length 146.4
  Top Layer w0.3: v1(75.844,39.188) 75.844,49.844 v1(76.5,50.5) ; U1.28 84.831,73.35 v1(84.988,73.508) ; J3.22@129,66.92 133,62.92 133,51.778 133.17,51.608 v1(133.17,51.5)
  Bottom Layer w0.2: 65.778,47.798 65.77,47.806 65.77,49.723 66.37,50.323 67.677,50.323
  Bottom Layer w0.3: J2.37 64.46,46.48 65.778,47.798 ; 67.677,50.323 68,50 76,50 82.483,56.483 82.924,56.483 88.83,62.389 88.83,64.844 84.988,68.685 v1(84.988,73.508) ; v1(75.844,39.188) 105.818,39.188 107.13,40.5 116.979,40.5 118.344,39.135 131.134,39.135 134.5,42.501 134.5,50.33 133.922,50.908 133.762,50.908 v1(133.17,51.5)
GPIO_38: J2.38 J3.23 U1.27 | length 131.2
  Top Layer w0.3: v1(67.843,41.859) 67.079,41.859 65.758,43.18 65.758,44.495 66.811,45.547 J2.38 70,49.52 70,54.5 73.033,57.533 73.033,75.394 74.639,77 77.423,77 80.573,73.85 U1.27 ; v1(104,43) 104,41.009 105.232,39.776 110.49,39.776 112.5,41.786 112.5,50.5 114.5,52.5 118.85,52.5 124.155,57.805 124.155,62.075 J3.23@126.46,64.38
  Bottom Layer w0.3: v1(67.843,41.859) 68.814,42.83 71.386,42.83 71.716,42.5 78.644,42.5 80.974,44.83 102.17,44.83 v1(104,43)
GPIO_40: J2.40 J3.24 U1.26 | length 109.1
  Top Layer w0.3: U1.26 85.688,74.35 86.947,73.092 v1(87.135,72.268) ; v1(115.976,49.022) 116.016,49.062 117.143,49.062 123.519,55.438 126.974,55.438 127.711,56.175 127.711,60.02 128.179,60.488 129.588,60.488 130.251,61.152 130.251,63.129 J3.24@129,64.38
  Bottom Layer w0.3: J2.40 70.844,47.824 77.824,47.824 86.5,56.5 ; v1(87.135,72.268) 91.914,67.489 91.914,59.365 90.05,57.5 87.5,57.5 86.5,56.5 ; v1(115.976,49.022) 115.96,49.038 114.462,49.038 107,56.5 86.5,56.5
LED_1: D1.A U1.57 | length 35.9
  Top Layer w0.3: v1(91.262,76.657) 92.12,75.35 U1.57 ; v1(101.892,87.719) 101.905,87.732 102.732,87.732 110.656,95.656 112.55,95.656 D1.A
  Bottom Layer w0.3: v1(91.262,76.657) 94.259,76.657 101.506,83.904 101.506,86.769 101.816,87.078 101.816,87.642 v1(101.892,87.719)
LED_2: D2.A U1.58 | length 32.8
  Top Layer w0.3: U1.58 96.215,75.85 97.008,75.057 101.498,75.057 101.956,74.6 107.6,74.6 109.973,76.973 109.973,88.713 112.395,91.135 112.55,91.135 D2.A
LED_3: D3.A U1.59 | length 33.6
  Top Layer w0.3: v1(92.092,77.495) 93.238,76.35 U1.59 ; v1(112.5,86) 112.5,87.95 D3.A
  Bottom Layer w0.3: v1(92.092,77.495) 96,81.403 96,84 101.433,89.433 104.067,89.433 107.074,86.426 111.247,86.426 111.674,86 v1(112.5,86)
LED_4: D4.A U1.61 | length 33.9
  Top Layer w0.3: v1(90,77) 91.334,78.334 92.717,78.334 93.701,77.35 U1.61 ; v1(111,85.5) 111.077,85.423 111.477,85.423 112.55,84.35 D4.A
  Bottom Layer w0.3: v1(90,77) 90,76.892 90.432,76.46 90.432,76.217 90.83,75.819 98.069,75.819 107.75,85.5 v1(111,85.5)
LED_5: D5.A U1.62 | length 21
  Top Layer w0.3: U1.62 96.369,77.85 97.942,76.276 v1(102.692,76.276) ; v1(112.5,78) 112.5,79.95 D5.A
  Bottom Layer w0.3: v1(102.692,76.276) 110.776,76.276 v1(112.5,78)
LED_6: D6.A U1.29 | length 37.1
  Top Layer w0.3: U1.29 84.379,72.85 85.79,71.438 87.935,71.438 87.935,71.933 v1(88.316,72.314) ; v1(112.547,71.323) 112.55,71.326 D6.A
  Bottom Layer w0.3: v1(88.316,72.314) 88.57,72.568 91.004,72.568 92.223,73.787 93.465,73.787 96.252,71 112.172,71 112.495,71.323 v1(112.547,71.323)
LED_PWR_K: D7.K R12.2 | length 3
  Top Layer w0.3: R12.2 D7.K
MCU_BOOT: R9.2 U1.60 | length 10.7
  Top Layer w0.3: U1.60 96.65,76.85 97.95,75.55 101.741,75.55 101.863,75.428 103.401,75.428 103.523,75.55 R9.2
MCU_JTDI: J1.4 U1.50 | length 25.8
  Top Layer w0.3: U1.50 98.156,71.85 108.276,61.73 J1.4
MCU_NRST: C4.2 R5.1 U1.7 | length 24.9
  Top Layer w0.3: U1.7 89.85,80.01 90.485,79.375 95.275,79.375 98.5,82.6 98.5,88.654 97.5,89.654 C4.2 97.65,91.357 99.893,93.6 100.65,93.6 R5.1
MCU_OSC_IN: C1.1 U1.5 X1.1 | length 11.2
  Top Layer w0.3: X1.1 88.95,89.871 89.443,89.378 C1.1 89.443,87.15 90.85,85.743 U1.5
MCU_OSC_OUT: R3.1 U1.6 | length 14.1
  Top Layer w0.3: R3.1 87.028,89.55 88.3,88.278 88.3,86 90.35,83.95 U1.6
MCU_PIN_1: J4.1 U1.33 | length 9.9
  Top Layer w0.3: J4.1 83.364,67.08 85.35,69.065 U1.33
MCU_PIN_2: J4.2 U1.34 | length 11.9
  Top Layer w0.3: J4.2 82.04,64.54 85.85,68.35 U1.34
MCU_PIN_3: J4.3 U1.35 | length 13.7
  Top Layer w0.3: J4.3 80.49,62 86.35,67.86 U1.35
MCU_PIN_4: J4.4 U1.36 | length 15.9
  Top Layer w0.3: J4.4 79.46,59.46 86.85,66.85 U1.36
MCU_PIN_5: J4.5 U1.37 | length 17.8
  Top Layer w0.3: J4.5 78.066,56.92 87.35,66.204 U1.37
MCU_PIN_6: J4.6 U1.38 | length 19.8
  Top Layer w0.3: J4.6 76.864,54.383 77.039,54.558 87.17,64.844 87.656,65.33 87.674,65.33 87.85,65.506 U1.38
MCU_SWCLK: J1.5 U1.49 | length 26.6
  Top Layer w0.3: U1.49 97.053,71.35 108.418,59.985 115.705,59.985 J1.5
MCU_SWDIO: J1.6 U1.46 | length 31.5
  Top Layer w0.3: U1.46 91.85,70.434 93.157,70.434 105.299,58.293 114.857,58.293 J1.6
MCU_SWITCH_1: R1.2 SW1.1 U1.42 | length 31.7
  Top Layer w0.3: SW1.1 R1.2 83.363,50.55 84.476,51.664 88.552,51.664 89.892,53.003 89.892,59.116 89.815,59.193 89.815,61.706 90,61.892 90,68.164 89.923,68.241 89.923,68.577 89.85,68.65 U1.42
MCU_SWITCH_2: R2.2 SW2.1 U1.43 | length 27.3
  Top Layer w0.3: SW2.1 R2.2 88.55,50.55 90.704,52.704 90.704,59.081 90.242,59.543 90.242,61.203 91,61.962 91,67.768 90.423,68.345 90.423,68.577 90.35,68.65 U1.43
MCU_SWO: J1.3 U1.55 | length 25.8
  Top Layer w0.3: U1.55 100.782,74.35 110.862,64.27 J1.3
NetC3_2: C3.2 U1.30 | length 9.5
  Top Layer w0.3: C3.2 77.994,75.143 80.787,72.35 U1.30
NetD1_K: D1.K R4.2 | length 4.1
  Top Layer w0.5: D1.K R4.2
NetD2_K: D2.K R6.2 | length 4.1
  Top Layer w0.5: D2.K R6.2
NetD3_K: D3.K R7.2 | length 4.1
  Top Layer w0.5: D3.K R7.2
NetD4_K: D4.K R8.2 | length 4.1
  Top Layer w0.5: D4.K R8.2
NetD5_K: D5.K R10.2 | length 4
  Top Layer w0.5: D5.K R10.2
NetD6_K: D6.K R11.2 | length 4.1
  Top Layer w0.5: D6.K R11.2
USB_D_N: J5.2 U1.44 | length 36.1
  Top Layer w0.235: J5.2 90.807,34.707 90.807,49.307 92.5,51 92.5,63.846 91.52,64.825 91.52,67.806 90.927,68.399 90.862,68.464 90.862,69.288 U1.44
USB_D_P: J5.3 U1.45 | length 36.1
  Top Layer w0.235: J5.3 91.243,34.707 91.243,49.127 92.935,50.82 92.935,64.026 91.955,65.006 91.955,67.986 91.362,68.579 91.362,69.288 U1.45
VBUS: C12.2 FB1.1 J5.1 | length 16
  Top Layer w0.3: J5.1 90.05,33.629 90.36,33.32 99.173,33.32 100.143,34.29 C12.2 100.55,35.093 FB1.1
XTAL_IN: C2.1 R3.2 X1.3 | length 7.2
  Top Layer w0.3: R3.2 C2.1 83.15,94.357 83.857,93.65 X1.3
pads on no net: J2.2 J2.4 J5.4 J5.6 J5.7 J5.8 J5.9 J5.10 J5.11

## Silkscreen, mask and mechanical layers (free items; w line width, h text height)
Top Overlay:
  text "A" at 64.019,99.5 h5
  text "B" at 126.297,99.5 h5
  text "Sailbot" at 91.579,54.067 h6

## Text inside footprints (layer, text, board x,y; h text height)
D1: Mechanical 13 "+" at 111.733,95 h1 r180
D2: Mechanical 13 "+" at 111.733,91 h1 r180
D3: Mechanical 13 "+" at 111.733,87 h1 r180
D4: Mechanical 13 "+" at 111.733,83 h1 r180
D5: Mechanical 13 "+" at 111.733,79 h1 r180
D6: Mechanical 13 "+" at 111.733,75 h1 r180
D7: Mechanical 13 "+" at 92.5,48.217 h1 r90